# Altium PCB PCB1.PcbDoc
Units mil, origin at the board's own origin, x right, y up, seen from the top; angles counter-clockwise.
Board outline 6000 x 4000 mil, 2 copper layers (Top Layer, Bottom Layer); 1 components, 0 nets, 6 pads, 0 vias.
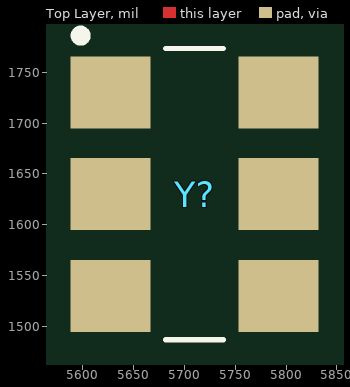
[diagram p0: Top Layer view]
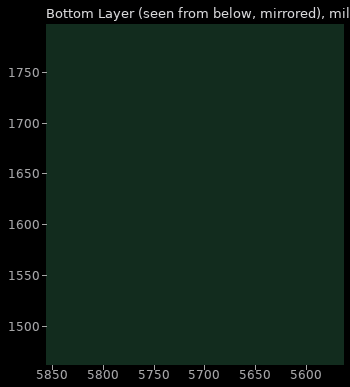
[diagram p1: Bottom Layer view, seen from below]

## Layer stack, top to bottom
Top Solder: solder mask 0.4, Solder Resist, Dk 3.5
Top Layer: signal copper 1.4
Dielectric 1: dielectric 12.6, FR-4, Dk 4.8
Bottom Layer: signal copper 1.4
Bottom Solder: solder mask 0.4, Solder Resist, Dk 3.5

## Board outline
1000,1000 7000,1000 7000,5000 1000,5000

## Design rules (kind name [scope] priority, off if disabled: settings)
Clearance [All] p1: gap=10 ignorepadtopadclearanceinfootprint=FALSE
PolygonConnect [All] p1: connectstyle=Relief reliefconductorwidth=10 reliefentries=4 polygonreliefangle="90 Angle" airgapwidth=10
RoutingVias [All] p1: holewidth=28 width=50 viastyle="Through Hole" minholewidth=28 minwidth=50 maxholewidth=28 maxwidth=50
SolderMaskExpansion [All] p1: expansion=4 istentingtop=FALSE
Width [All] p1: maxlimit=10 minlimit=10 preferedwidth=10
30 further rules are at their usual default settings.

## Components (designator, comment, footprint, x,y, rotation, side; value= is the part's Value field where it differs from the comment)
Y? "XLH735008.000000X" JU6_MFG 5710,1630 r0 top

## Footprints (in the part's own frame and the unit in brackets; to place one, negate y for a bottom-side part, rotate by r counter-clockwise, add the part's x,y. Pads: shape width x height; smd on the part's side, far side on the other; paste and mask are expansions set on the pad)
JU6_MFG [mm] "Recommended Land Pattern"
  rect 2x1.8 smd: 1(-2.1,2.54) 2(-2.1,0) 3(-2.1,-2.54) 4(2.1,-2.54) 5(2.1,0) 6(2.1,2.54)
  silkscreen extent -2.97,-3.64 0.72,4.09, body extent -3.2,-3.67 3.2,3.67, height 0.25

## Part data
Y?: library part CMP-00572-107081545-1, "Oscillator, 8Mhz, Hcmos, 7Mm X 5Mm Rohs Compliant: Yes", Case/Package=CLCC, Max Input Voltage=3.465V, Max Operating Temperature=70°C, Max Output Frequency=9.9MHz, Min Input Voltage=3.135V, Min Operating Temperature=-20°C, ComponentLink1Description="Manufacturer's Website", ComponentLink1URL=http://www.renesas.com, ComponentLink2Description="Datasheet URL", ComponentLink2URL=https://octopart.com/cad-content/api/get-model-datasheet/15189/107081545, ComponentLink3Description="Manufacturer's Package Drawing", ComponentLink3URL=https://www.renesas.com/en/document/psc/ju6-package-outline-70-x-50-mm-body-13-mm-thick, Height=1.45mm, HelpURL=https://octopart.com/cad-content/api/get-model-datasheet/15189/107081545, Mount="Surface Mount", Number of Pins=6, Output Type=LVCMOS, RoHS=Compliant

## Nets (pads, with @x,y where several pads share a name; then routed paths per layer and width w, separated by ;. In a path a pad name is that pad's centre, name@x,y a point inside that pad or via, vN(x,y) a via of type N, cw(c..) or ccw(c..) an arc to the next point about the centre after c; other vN are vias at no path point)
pads on no net: Y?.1 Y?.2 Y?.3 Y?.4 Y?.5 Y?.6